# Altium PCB Board.PcbDoc
Units mil, origin at the board's own origin, x right, y up, seen from the top; angles counter-clockwise.
Board outline 3930 x 1750 mil, 2 copper layers (Top Layer, Bottom Layer); 33 components, 53 nets, 210 pads, 48 vias.
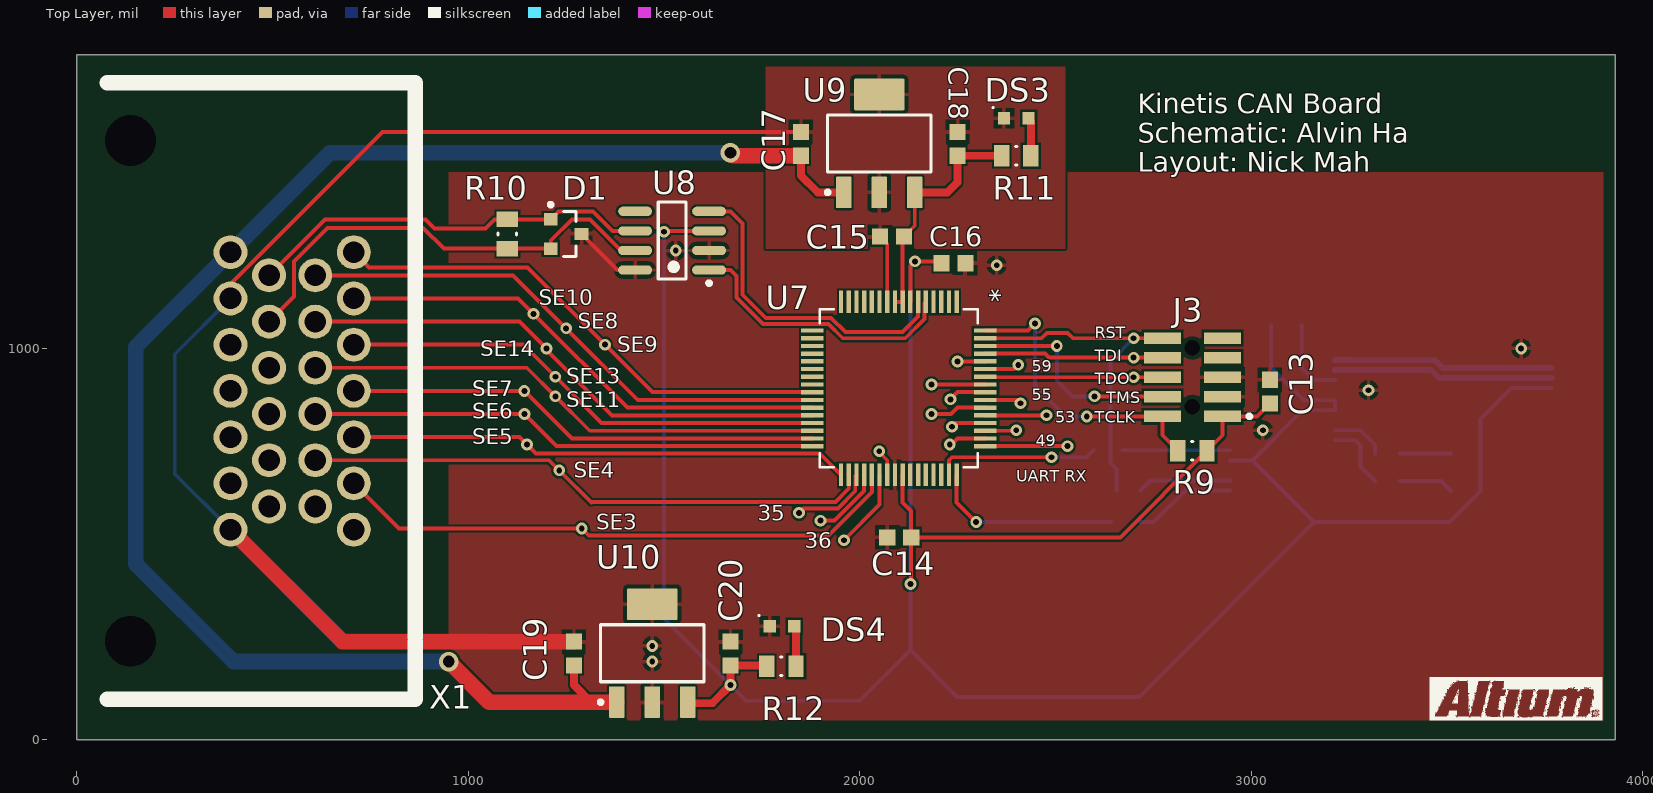
[diagram p0: Top Layer view]
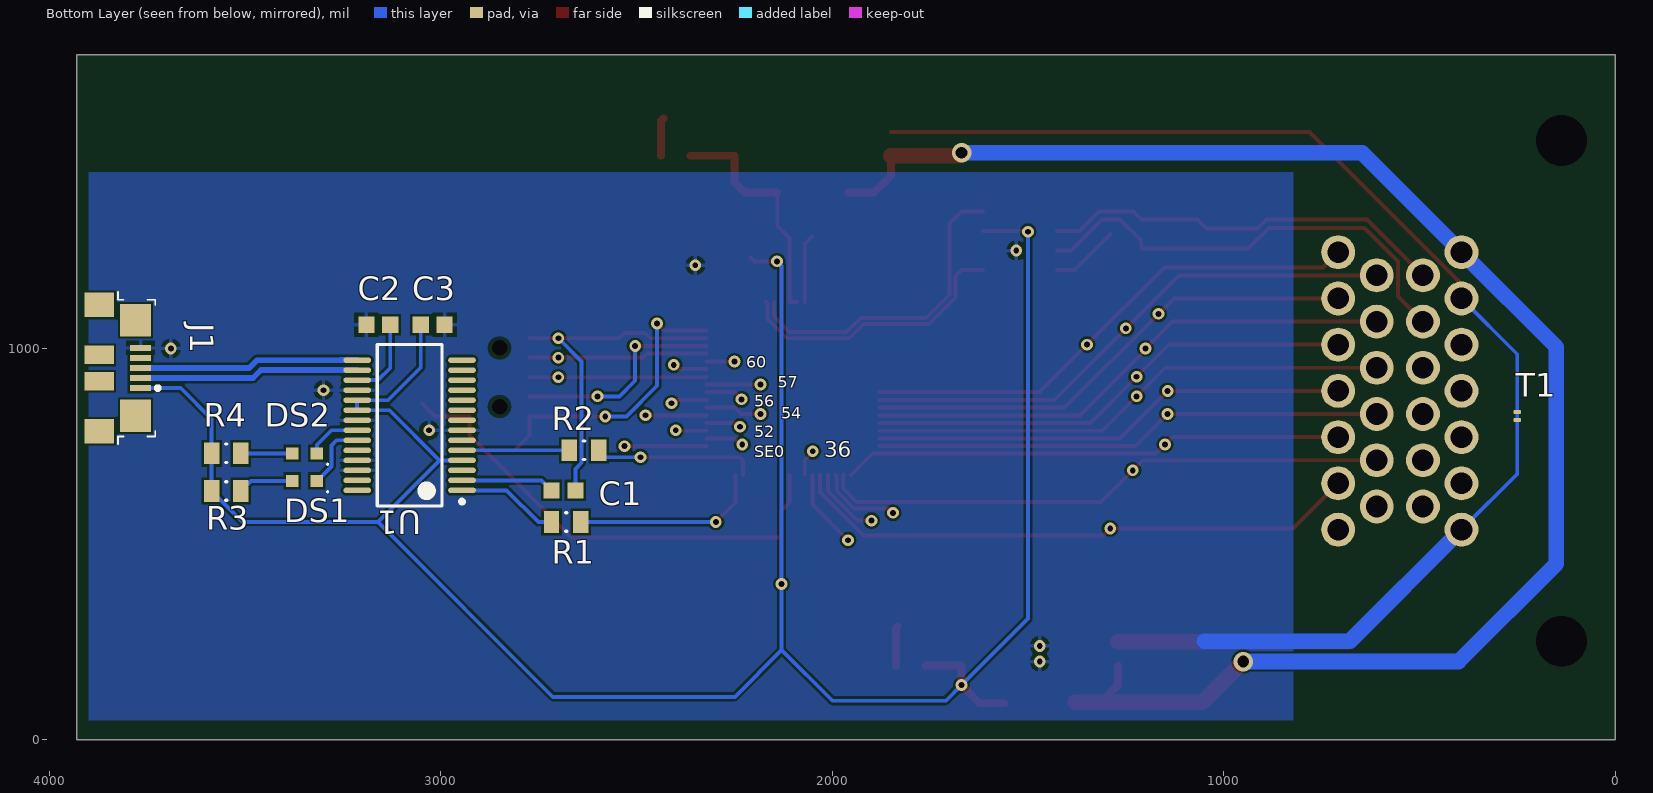
[diagram p1: Bottom Layer view, seen from below]

## Layer stack, top to bottom
Top Solder: solder mask 0.4, Solder Resist, Dk 3.5
Top Layer: signal copper 1.4
Dielectric 1: dielectric 12.6, FR-4, Dk 4.8
Bottom Layer: signal copper 1.4
Bottom Solder: solder mask 0.4, Solder Resist, Dk 3.5

## Board outline
0,0 3930,0 3930,1750 0,1750

## Design rules (kind name [scope] priority, off if disabled: settings)
Clearance [InNetClass('All Nets')] p1: gap=6 ignorepadtopadclearanceinfootprint=FALSE except(10: Arc-Hole Track-Hole SMDPad-Hole THPad-Hole Via-Hole Fill-Hole Poly-Hole Region-Hole Text-Hole)
DiffPairsRouting [All] p1: maxlimit=10 minlimit=10 mostfreqgap=10 toplayer_minwidth=10 toplayer_maxwidth=15 toplayer_prefwidth=15 bottomlayer_minwidth=10 bottomlayer_maxwidth=15 bottomlayer_prefwidth=15 maxuncoupledlength=500
FabricationTestPointUsage TestPointUsage [All] p1: valid=0 allowmultiple=FALSE
FabricationTestpoint Testpoint [All] p1: side=3 testpointundercomponent=TRUE minsize=40 maxsize=100 preferedsize=60 minholesize=20 maxholesize=40 preferedholesize=32 testpointgrid=1 allowsidetop=TRUE allowsidebottom=TRUE usegrid=TRUE gridtolerance=0.01
HoleSize [All] p1: absolutevalues=TRUE maxlimit=247 minlimit=10 maxpercent=80.000 minpercent=20.000
PasteMaskExpansion PasteMaskExpansion_1 [InComponent('P1')] p1: expansion=-150
PasteMaskExpansion [All] p2: expansion=0
PlaneClearance [All] p1: clearance=5
PlaneConnect [All] p1: planeconnectstyle=Relief reliefexpansion=15 reliefentries=4 reliefconductorwidth=10 reliefairgap=10
PolygonConnect [All] p1: connectstyle=Relief reliefconductorwidth=10 reliefentries=4 polygonreliefangle="90 Angle" airgapwidth=10
RoutingVias [All] p1: holewidth=15 width=30 viastyle="Through Hole" minholewidth=10 minwidth=20 maxholewidth=60 maxwidth=50
SilkToSolderMaskClearance SilkscreenOverComponentPads [IsPad] p1: minsilkscreentomaskgap=10 clearancetoexposedcopper=TRUE
SolderMaskExpansion [All] p1: expansion=5
UnRoutedNet [All] p1: checkbadconnections=TRUE
Width [All] p1: maxlimit=150 minlimit=6 preferedwidth=10 minimp=50.000000 maximp=50.000000 favimp=50.000000
21 further rules are at their usual default settings.

## Classes and differential pairs
net class ADC0_SE[15..0]: ADC0_SE0 ADC0_SE1 ADC0_SE2 ADC0_SE3 ADC0_SE4 ADC0_SE5 ADC0_SE6 ADC0_SE7 ADC0_SE8 ADC0_SE9 ADC0_SE10 ADC0_SE11 ADC0_SE12 ADC0_SE13 ADC0_SE14 ADC0_SE15
component class USB: C1 C2 C3 C? DS1 DS2 DS? J1 R1 R2 R3 R4 R? U1
component class KinetisCANBoard: T1 X1
component class PWR: C17 C18 C19 C20 DS3 DS4 R11 R12 U9 U10
component class MCU: C13 C14 C15 C16 J3 R9 U7
component class COM: D1 R10 U8
differential pair D: +D_P -D_N
differential pair CAN0: +CAN0_P -CAN0_N

## Components (designator, comment, footprint, x,y, rotation, side; value= is the part's Value field where it differs from the comment)
C1 "0.1uF" "CAP SMT 0603" 2595.35,575.44 r180 bottom
C2 "0.1uF" "CAP SMT 0603" 3068.32,998.51 r180 bottom
C3 "0.1uF" "CAP SMT 0603" 3112.6,1122.52 r0 bottom
C13 "0.1uF" "CAP SMT 0603" 2985.99,797.95 r270 top
C14 "0.1uF" "CAP SMT 0603" 2192.52,455.33 r0 top
C15 "0.1uF" "CAP SMT 0603" 2173.81,1223.71 r0 top
C16 "100 pF" "CAP SMT 0603" 2147.95,1279.5 r180 top
C17 "0.22uF" "CAP SMT 0603" 1787.99,1431.28 r270 top
C18 "0.1uF" "CAP SMT 0603" 2187.99,1431.28 r270 top
C19 "0.22uF" "CAP SMT 0603" 1207.99,128.98 r270 top
C20 "0.1uF" "CAP SMT 0603" 1607.99,128.98 r270 top
D1 "NUP2105LT1G" ONSC-SOT-23-3-318-08_V 1250,1292.54 r0 top
DS1 "APG1608CGKC/T" "GREEN LED" 3348.5,661.47 r0 bottom
DS2 "APG1608SURKC/T" "RED LED" 3348.5,731.74 r0 bottom
DS3 "APG1608CGKC/T" "GREEN LED" 2400,1587.77 r0 top
DS4 "APG1608CGKC/T" "GREEN LED" 1801.5,290 r0 top
J1 "ZX62R-B-5P" HIRO-ZX62R-B-5P_V 3820,950 r270 bottom
J3 "HDR2x5" "HDR 2X5" 2850,926.41 r90 top
R1 "1k" "RES SMT 0805" 2680,556.57 r180 bottom
R2 "1k" "RES SMT 0805" 2634.25,740 r180 bottom
R3 "1k" "RES SMT 0805" 3548.5,635.87 r0 bottom
R4 "1k" "RES SMT 0805" 3548.5,731.74 r0 bottom
R9 "10k" "RES SMT 0805" 2850,738.82 r0 top
R10 "120" "RES SMT 0805" 1100,1292.54 r270 top
R11 "470" "RES SMT 0805" 2400,1492.3 r0 top
R12 "470" "RES SMT 0805" 1799.74,188.03 r0 top
T1 "Net Tie" "NET TIE 10MIL" 250,827.5 r270 bottom net-tie
U1 "FT232RL" SSOP-28_L 3080,803.79 r0 bottom
U7 "MKE16F512VLH16" MKE16F512VLH16 2100,898.07 r270 top
U8 "MCP2551-E/SN" SOIC-SN8_N 1520.72,1275.35 r180 top
U9 "LM340MP-5.0" DCY0004A_M 2050,1523.8 r90 top
U10 "LM340MP-5.0" DCY0004A_M 1470,221.3 r90 top
X1 "TE Superseal 26 POS" TE_SUPERSEAL_26 550,891.54 r0 top

## Footprints (in the part's own frame and the unit in brackets; to place one, negate y for a bottom-side part, rotate by r counter-clockwise, add the part's x,y. Pads: shape width x height; smd on the part's side, far side on the other; paste and mask are expansions set on the pad)
"CAP SMT 0603" [mm] "Chip Capacitor, 2-Leads, Body 1.63x0.83mm, IPC Medium Density"
  rect 1.05x1.05 smd: 1(-3.1,1.575) 2(-1.55,1.575)
  body extent -3.22,1.08 -1.42,2.07, height 0.94
DCY0004A_M [mm] "SOT223, 4-Leads, Body 6.7x3.7mm, Pitch 2.3mm, IPC Low Density"
  rrect10% 2.05x1 smd: 1(-3.175,2.3) 2(-3.175,0) 3(-3.175,-2.3)
  rrect5% 2.05x3.25 smd: 4(3.175,0)
  silkscreen extent -3.3,-3.35 1.85,3.47, body extent -3.5,-3.25 3.5,3.25, height 1.62
"GREEN LED" [mm] "Chip Diode, 2-Leads, Body 1.60x0.80mm, IPC Medium Density"
  rect 0.8x0.8 smd: 1(-0.8,0) 2(0.8,0)
  silkscreen extent -1.55,0.65 -1.45,0.75, body extent -0.81,-0.4 0.81,0.4, height 1.1
"HDR 2X5" [mm] "Header, 10-Leads, Body 3.43x6.35mm, Pitch 1.27mm"
  rect 0.76x2.4 smd: 1(-2.54,-1.95) 2(-2.54,1.95) 3(-1.27,-1.95) 4(-1.27,1.95) 5(0,-1.95) 6(0,1.95) 7(1.27,-1.95) 8(1.27,1.95) 9(2.54,-1.95) 10(2.54,1.95)
  round 0 hole 1 unplated: MH1(-1.905,0) MH2(1.905,0)
  silkscreen extent -2.66,-3.83 -2.42,-3.58, body extent -3.17,-1.72 3.17,1.72, height 4.55
HIRO-ZX62R-B-5P_V [mm] "USB Micro-B R/A Connector"
  rect 0.4x1.35 smd: 1(1.3,1.338) 2(0.65,1.338) 3(0,1.338) 4(-0.65,1.338) 5(-1.3,1.338)
  rect 2.1x2 smd: 6(-3.1,1.012) 11(3.1,1.012)
  rect 1.6x1.9 smd: 7(-4.1,-1.338) 10(4.1,-1.338)
  rect 1.2x1.9 smd: 8(-0.85,-1.338) 9(0.85,-1.338)
  silkscreen extent -4.95,-0.13 4.95,2.58, body extent -4.4,-3.95 4.4,1.78, height 2.71
MKE16F512VLH16 [mil]
  rect 58x11 smd: 1(-221,147.64) 2(-221,127.95) 3(-221,108.27) 4(-221,88.58) 5(-221,68.9) 6(-221,49.21) 7(-221,29.53) 8(-221,9.84) 9(-221,-9.84) 10(-221,-29.53) 11(-221,-49.21) 12(-221,-68.9) 13(-221,-88.58) 14(-221,-108.27) 15(-221,-127.95) 16(-221,-147.64) 33(221,-147.64) 34(221,-127.95) 35(221,-108.27) 36(221,-88.58) 37(221,-68.9) 38(221,-49.21) 39(221,-29.53) 40(221,-9.84) 41(221,9.84) 42(221,29.53) 43(221,49.21) 44(221,68.9) 45(221,88.58) 46(221,108.27) 47(221,127.95) 48(221,147.64)
  rect 11x58 smd: 17(-147.64,-221) 18(-127.95,-221) 19(-108.27,-221) 20(-88.58,-221) 21(-68.9,-221) 22(-49.21,-221) 23(-29.53,-221) 24(-9.84,-221) 25(9.84,-221) 26(29.53,-221) 27(49.21,-221) 28(68.9,-221) 29(88.58,-221) 30(108.27,-221) 31(127.95,-221) 32(147.64,-221) 49(147.64,221) 50(127.95,221) 51(108.27,221) 52(88.58,221) 53(68.9,221) 54(49.21,221) 55(29.53,221) 56(9.84,221) 57(-9.84,221) 58(-29.53,221) 59(-49.21,221) 60(-68.9,221) 61(-88.58,221) 62(-108.27,221) 63(-127.95,221) 64(-147.64,221)
  silkscreen extent -202,-202 202,202, body extent -236,-237 236,236, height 61
"NET TIE 10MIL" [mil]
  rrect50% 10x19 smd: 1(10,0) 2(-10,0)
  Top Layer lines w10: 10,0 -10,0
ONSC-SOT-23-3-318-08_V [mm] "SOT23, 3-Leads, Body 2.92x1.3mm, Pitch 0.95mm"
  rect 0.9x0.8 smd: 1(-1,0.95) 2(-1,-0.95) 3(1,0)
  silkscreen extent -1.12,-1.46 0.65,2.02, body extent -0.65,-1.46 0.65,1.46, height 1.11
"RED LED" [mm] "Chip Diode, 2-Leads, Body 1.60x0.80mm, IPC Medium Density"
  rect 0.8x0.8 smd: 1(-0.8,0) 2(0.8,0)
  silkscreen extent -1.55,0.65 -1.45,0.75, body extent -0.8,-0.4 0.8,0.4, height 0.6
"RES SMT 0805" [mm] "Chip Resistor, 2-Leads, Body 2.05x1.25mm, IPC Medium Density"
  rect 1x1.4 smd: 1(-0.95,0) 2(0.95,0)
  silkscreen extent -0.05,-0.6 0.05,0.6, body extent -1.1,-0.7 1.1,0.7, height 0.5
SOIC-SN8_N [mm] "SOIC, 8-Leads, Body 4.9x3.9mm, Pitch 1.27mm, IPC Medium Density"
  oval 2.2x0.6 smd: 1(-2.4,1.905) 2(-2.4,0.635) 3(-2.4,-0.635) 4(-2.4,-1.905) 5(2.4,-1.905) 6(2.4,-0.635) 7(2.4,0.635) 8(2.4,1.905)
  silkscreen extent -2.53,-2.5 0.9,2.88, body extent -2,-2.5 2,2.5, height 1.75
SSOP-28_L [mm] "SOP, 28-Leads, Body 10.2x5.3mm, Pitch 0.65mm, IPC High Density"
  oval 1.8x0.35 smd: 1(-3.4,4.225) 2(-3.4,3.575) 3(-3.4,2.925) 4(-3.4,2.275) 5(-3.4,1.625) 6(-3.4,0.975) 7(-3.4,0.325) 8(-3.4,-0.325) 9(-3.4,-0.975) 10(-3.4,-1.625) 11(-3.4,-2.275) 12(-3.4,-2.925) 13(-3.4,-3.575) 14(-3.4,-4.225) 15(3.4,-4.225) 16(3.4,-3.575) 17(3.4,-2.925) 18(3.4,-2.275) 19(3.4,-1.625) 20(3.4,-0.975) 21(3.4,-0.325) 22(3.4,0.325) 23(3.4,0.975) 24(3.4,1.625) 25(3.4,2.275) 26(3.4,2.925) 27(3.4,3.575) 28(3.4,4.225)
  silkscreen extent -3.52,-5.25 2.1,5.25, body extent -2.8,-5.25 2.8,5.25, height 2
TE_SUPERSEAL_26 [mm]
  round 2.2 hole 1.4: 1(4,9) 2(4,6) 3(4,3) 4(4,0) 5(4,-3) 6(4,-6) 7(4,-9) 8(1.5,7.5) 9(1.5,4.5) 10(1.5,1.5) 11(1.5,-1.5) 12(1.5,-4.5) 13(1.5,-7.5) 14(-1.5,7.5) 15(-1.5,4.5) 16(-1.5,1.5) 17(-1.5,-1.5) 18(-1.5,-4.5) 19(-1.5,-7.5) 20(-4,9) 21(-4,6) 22(-4,3) 23(-4,0) 24(-4,-3) 25(-4,-6) 26(-4,-9)
  round 0 hole 3.3 unplated: 27(-10.5,16.25) 28(-10.5,-16.25)
  silkscreen extent -12,-20 8,20, body extent -30.05,-19.77 6.45,19.72, height 28.15

## Part data
C1 C2 C3 C13 C14 C15 C18 C20: library part "Capacitor 0.1uF 25V 0603", Supplier Part Number 1=445-5667-6-ND, Supplier 1=Digi-Key
C16: library part "Capacitor 100 pF 25V 0603", Supplier Part Number 1=445-4675-6-ND, Supplier 1=Digi-Key
C17 C19: library part "Capacitor 0.22uF 25V 0603", Supplier Part Number 1=445-5191-6-ND, Supplier 1=Digi-Key
D1: library part CMP-1063-00164-1, "Dual Line CAN Bus Protector, 3-Pin SOT-23, Pb-Free, Tape and Reel", Manufacturer="On Semiconductor", C Max (pF)=30, ComponentLink1Description="Manufacturer URL", ComponentLink1URL=http://www.onsemi.com/, ComponentLink2Description=Datasheet, ComponentLink2URL=http://www.onsemi.cn/pub_link/Collateral/NUP2105L-D.PDF, ComponentLink3Description="Package Specification", ComponentLink3URL=http://www.onsemi.cn/pub_link/Collateral/318-08.PDF, DatasheetVersion="Rev. 5", Direction=Bidirectional, IR Max (uA)=0.1, Mounting Technology="Surface Mount", Number of Lines=2, PackageDescription="3-Pin Small Outline Transistor, Body 2.92 x 1.3 mm, Pitch 0.95 mm", PackageReference=SOT-23-3-318-08, PackageVersion="Rev. AP, 11/2009", Packing="Tape and Reel", PartNumber=NUP2105LT1G, PPK Max (W)=350, RoHS=Pb-Free, V(BR) Min (V)=26.2
DS1 DS3 DS4: library part "Green LED", Supplier Part Number 1=754-1357-6-ND, Supplier 1=Digi-Key
DS2: library part "RED LED", Supplier Part Number 1=754-1359-6-ND, Supplier 1=Digi-Key
J1: library part CMP-0031-00001-1, "Connector; USBMicro-B,Reverse type, SMT; 5 Position; Right Angle", Operating Temperature="-30 to 85 degC", ComponentLink1Description="Manufacturer URL", ComponentLink1URL=http://www.hirose.com/‎, ComponentLink2Description=Datasheet, ComponentLink2URL=http://www.hirose.co.jp/cataloge_hp/e24200011.pdf, DatasheetVersion=08/2010, Mounting Technology="Surface Mount", PackageDescription="5-Pin USB Micro-B R/A Connector", PackageReference=ZX62R-B-5P, PartNumber=ZX62R-B-5P
J3: Supplier Part Number 1=1175-1735-ND, Supplier 1=Digi-Key
R1 R2 R3 R4: library part "Resistor 1k 1% 0805", Supplier Part Number 1=541-1.00KCDKR-ND, Supplier 1=Digi-Key
R9: library part "Resistor 10k 1% 0805", Supplier Part Number 1=541-10.0KCDKR-ND, Supplier 1=Digi-Key
R10: library part "Resistor 120 1% 0805", Supplier Part Number 1=541-120CDKR-ND, Supplier 1=Digi-Key
R11 R12: library part "Resistor 470 1% 0805", Supplier Part Number 1=541-470KCDKR-ND, Supplier 1=Digi-Key
U1: library part CMP-0078-00029-1, "USB UART Asynchronous Serial Data Transfer Chip, SSOP-28, Tape and Reel", DatasheetVersion="ver 2.07, Jul-2010", PackageDescription="28-Pin Small Outline Package 0.65 mm Pitch", PackageReference=SSOP-28, PackageVersion=2010
U8: library part CMP-0186-00038-2, "High-Speed CAN Transceiver, 8-Pin SOIC, Extended Temperature", Code_IPC=SOIC127P600-8, Code_JEDEC=MS-012, ComponentLink1Description="Manufacturer URL", ComponentLink1URL=http://www.microchip.com/, ComponentLink2Description=Datasheet, ComponentLink2URL=http://ww1.microchip.com/downloads/en/DeviceDoc/21667F.pdf, ComponentLink3Description="Package Specification", ComponentLink3URL=http://www.microchip.com/stellent/groups/techpub_sg/documents/packagingspec/en012702.pdf, DatasheetVersion="revF, Jul-2010", PackageDescription="8-Lead Plastic Small Outline (SN) - Narrow, 3.90mm Body [SOIC]", PackageReference=SOIC-SN8, PackageVersion="revBB, Aug-2009", RevisionNote="URLs added. DatasheetVersion updated."
U9 U10: library part CMP-0062-01765-3, "Series 3-Terminal Positive Regulators, 4-pin SOT-223", Manufacturer="Texas Instruments", PackageTopMarking=XYTT*N00A, PowerWise=N, Code_IPC=SOT223-4, Code_JEDEC=TO-261-AA, ComponentLink1Description="Datasheet URL", ComponentLink1URL=http://www.ti.com/general/docs/lit/getliterature.tsp?genericPartNumber=LM340-N&fileType=pdf, CompType="LDO IC", PackageDescription="Molded SOT-223, 6.50 x 3.56 x 1.6mm Body, 4 Lead, 2.3mm Pitch", PackageReference=DCY0004A, PinCount=4, RoHS=N

## Via types
v1: diameter 30, hole 15, Top Layer to Bottom Layer, 46 vias
v2: diameter 50, hole 30, Top Layer to Bottom Layer, 2 vias

## Nets (pads, with @x,y where several pads share a name; then routed paths per layer and width w, separated by ;. In a path a pad name is that pad's centre, name@x,y a point inside that pad or via, vN(x,y) a via of type N, cw(c..) or ccw(c..) an arc to the next point about the centre after c; other vN are vias at no path point)
12V: C17.2 C19.2 U9.1 U10.1 X1.20 | length 4127.9
  Top Layer w20: C19.2 1270,140 1313.7,96.3 ; C17.2 1850,1441.51 1892.72,1398.8 U9.1
  Top Layer w40: v2(950,200) 1053.7,96.3 1313.7,96.3 U10.1 ; v2(1669.65,1500) 1677.34,1492.3 C17.2
  Bottom Layer w40: v2(950,200) 400,200 150,450 150,1003.35 X1.20 646.65,1500 v2(1669.65,1500)
ADC0_SE0: U7.50 | length 97.4
  Top Layer w10: v1(2230,754.72) 2234.61,754.72 2250,770.11 U7.50
ADC0_SE1: U7.49 | length 209.9
  Top Layer w10: U7.49 v1(2530.91,750.43)
ADC0_SE2: U7.38 | length 204.7
  Top Layer w10: v1(1960,510) 2050.79,600.79 U7.38
ADC0_SE3: U7.37 X1.6 | length 1468.8
  Top Layer w10: X1.6 822.8,540 v1(1290,540) 1307.82,522.18 1920.45,522.18 2031.1,632.84 U7.37
ADC0_SE4: U7.34 X1.12 | length 1479.1
  Top Layer w10: X1.12@623.71,699.71 X1.12 1206.61,714.37 v1(1232.35,688.63) 1314.47,606.51 1315.47,607.51 1937.9,607.51 1972.05,641.66 U7.34 U7.34@1971.55,677.57
ADC0_SE5: U7.33 X1.5 | length 1284.8
  Top Layer w10: X1.5 1131.3,773.43 v1(1150,754.72) 1173.14,731.59 1897.84,731.59 U7.33
ADC0_SE6: U7.32 X1.11 | length 1303.9
  Top Layer w10: X1.11 v1(1143.71,832.48) 1225.76,750.43 U7.32
ADC0_SE7: U7.31 X1.4 | length 1221.8
  Top Layer w10: X1.4 v1(1143.15,891.54) 1264.57,770.11 U7.31
ADC0_SE8: U7.26 X1.8 | length 1401.8
  Top Layer w10: X1.8 1114.56,1186.81 v1(1250,1051.37) 1432.84,868.54 U7.26
ADC0_SE9: U7.25 X1.1 | length 1319.7
  Top Layer w10: X1.1 746.04,1207.3 1151.6,1207.3 v1(1349.26,1009.65) 1470.68,888.22 U7.25
ADC0_SE10: U7.21
ADC0_SE11: U7.30 X1.10 | length 1336.5
  Top Layer w10: X1.10 1149.41,950.59 v1(1222.41,877.59) 1310.2,789.8 U7.30
ADC0_SE12: U7.20
ADC0_SE13: U7.29 X1.3 | length 1254.4
  Top Layer w10: X1.3 1140.35,1009.65 v1(1222.41,927.59) 1340.52,809.48 U7.29
ADC0_SE14: U7.28 X1.9 | length 1371.5
  Top Layer w10: X1.9 1131.3,1068.7 v1(1200,1000) 1200,996.03 1366.87,829.17 U7.28
ADC0_SE15: U7.27 X1.2 | length 1287
  Top Layer w10: X1.2 1127.33,1127.76 v1(1166.7,1088.39) 1406.24,848.85 U7.27
AGND: C15.1 C17.1 C18.1 DS3.1 T1.2 U7.10 U9.2 U9.4 X1.21 | length 2179.4
  Top Layer w10: X1.21 392.52,1165.19 780.66,1553.32 C17.1 ; C15.1 2070.47,1267.01 U7.10
  Bottom Layer w10: T1.2 250,985.24 X1.21
AVCC_5V: C15.2 C18.2 R11.1 U7.8 U7.9 U9.3 | length 612.7
  Top Layer w10: U7.9 U7.8 2109.84,1282.77 C15.2 2140.55,1313.47 U9.3
  Top Layer w20: U9.3 2224.43,1398.8 2250,1424.37 C18.2 R11.1
AVCC_LED: DS3.2 R11.2 | length 97.9
  Top Layer w20: DS3.2 2437.4,1581.87 R11.2
CAN0_N: D1.1 R10.1 U8.6 X1.14 | length 1042.7
  Top Layer w10: X1.14 634.07,1329.94 890.88,1329.94 914.14,1306.68 1044.18,1306.68 1067.44,1329.94 R10.1 D1.1 1230.63,1349.94 1318.78,1349.94 1368.36,1300.35 U8.6
CAN0_P: D1.2 R10.2 U8.7 X1.15 | length 1185.3
  Top Layer w10: X1.15 554.75,1132.5 554.75,1222.33 640.66,1308.24 884.3,1308.24 937.4,1255.14 R10.2 D1.2 1210.63,1276 1264.57,1329.94 1310.5,1329.94 1390.08,1250.35 U8.7
CAN_UART_RX: U7.6 U8.4 | length 822.4
  Top Layer w10: U8.4 1670,1350.35 1701,1319.35 1701,1137.19 1759.98,1078.2 1927.08,1078.2 1963.26,1042.02 2109.73,1042.02 2149.21,1081.5 U7.6
CAN_UART_TX: U7.5 U8.1 | length 720.1
  Top Layer w10: U8.1 1669.65,1200.35 1685,1185 1685,1130.56 1753.36,1062.2 1920.45,1062.2 1956.63,1026.02 2116.36,1026.02 2165.71,1075.38 2165.71,1115.88 U7.5
D_N: J1.2 U1.16 | length 562.1
  Bottom Layer w15: U1.16 3256.79,944.54 3257.09,944.83 3459.64,944.83 3480.07,924.41 J1.2
D_P: J1.3 U1.15 | length 561.8
  Bottom Layer w15: U1.15 3256.79,970.13 3257.09,969.83 3470,969.83 3489.83,950 J1.3
DGND: C2.1 C3.1 C13.1 C14.1 C16.1 C19.1 C20.1 D1.3 DS4.1 J1.5 J3.3 J3.5 T1.1 U1.7 U1.18 U1.21 U1.25 U1.26 U7.40 U8.2 U8.8 U10.2 U10.4 X1.26 | length 2286.1
  Top Layer w10: D1.3 1381.55,1200.35 U8.8
  Top Layer w40: X1.26 678.7,251.02 C19.1
  Bottom Layer w10: T1.1 250,679.72 X1.26
  Bottom Layer w40: X1.26 677.95,251.77 1050,251.77
  other v1: 1470,200 1470,240 3030,790.99 3300,893.35 3690,1000 2350,1212.49 1530,1250
DTR: C1.1 U1.2 | length 239.3
  Bottom Layer w10: C1.1 2742.99,663.04 U1.2
DVCC_5V: C3.2 C13.2 C14.2 C16.2 C20.2 J1.1 J3.1 R3.2 R4.2 R9.2 R12.1 U1.4 U1.19 U1.20 U7.7 U7.41 U8.3 U10.3 | length 7702.7
  Top Layer w10: v1(1500,1298.24) 1502.12,1300.35 U8.3 ; U7.41 2109.84,606.51 2131.5,584.86 C14.2 ; v1(2129.53,398.03) 2131.5,400 C14.2 ; U7.7 2129.53,1211.02 v1(2141.1,1222.59) 2199.02,1222.59 C16.2@2208.98,1232.55 ; C13.2 3015.44,826.41 J3.1 2926.77,778.19 R9.2 2665.92,517.34 C14.2
  Top Layer w20: U10.3@1560.02,93.56 1623.56,93.56 v1(1670,140) C20.2 1760.37,190 R12.1
  Bottom Layer w10: v1(1500,1298.24) 1500,310 v1(1670,140) 1710,100 2000,100 2129.53,229.53 ; v1@2141.1,1227.96 v1(2141.1,1222.59) 2129.53,1211.02 v1(2129.53,398.03) 2129.53,229.53 ; U1.4 3003.23,714.22 ; C3.2 3051.57,951.46 3135.27,867.76 U1.19 U1.20 3131.18,842.17 3003.23,714.22 ; J1.1 3664.72,898.82 3585.91,820 R4.2 R3.2 3506.6,556.57 3160.88,556.57 ; 2129.53,229.53 2249.06,110 2714.3,110 3160.88,556.57 ; 3003.23,714.22 3160.88,556.57
DVCC_LED: DS4.2 R12.2 | length 103.7
  Top Layer w20: DS4.2 1837.14,285.85 R12.2
FTDI_GREEN: DS1.1 U1.23 | length 177.9
  Bottom Layer w10: U1.23 3267.14,765.4 3280,752.55 3280,698.47 DS1.1
FTDI_RED: DS2.1 U1.22 | length 140.7
  Bottom Layer w10: U1.22 3280,790.99 3317.01,753.98 DS2.1
FTDI_UART_RX: R2.2 U7.47 | length 427.8
  Top Layer w10: U7.47 2227.95,714.37 2235.7,722.11 2482.57,722.11 2490.32,729.86 v1(2490.32,722.11)
  Bottom Layer w10: v1(2490.32,722.11) 2578.96,722.11 R2.2
FTDI_UART_TX: R1.2 U7.48 | length 486.2
  Top Layer w10: U7.48 2247.64,606.51 v1(2297.58,556.57)
  Bottom Layer w10: v1(2297.58,556.57) R1.2
JTAG_RST: C1.2 J3.10 U7.63 | length 894.3
  Top Layer w10: U7.63 2464.69,1026.02 2478.67,1040 2531.33,1040 2545.31,1026.02 v1(2700,1026.02) 2770.47,1026.02 2772.05,1027.59 J3.10
  Bottom Layer w10: C1.2 2656.38,692.47 2640.97,707.88 2640.97,966.99 v1(2700,1026.02) v1@2700,1016.06
JTAG_TCLK: J3.4 U7.62 | length 560
  Top Layer w10: U7.62 v1(2503.74,1006.33) v1@2505.71,1006.33 ; v1(2600,877.59) 2772.05,877.59 J3.4
  Bottom Layer w10: v1(2503.74,1006.33) 2503.74,917.54 2543.68,877.59 v1(2600,877.59)
JTAG_TDI: J3.8 U7.61 | length 457.4
  Top Layer w10: U7.61 2473.35,986.65 2483.59,976.41 v1(2700,976.41) 2770.87,976.41 2772.05,977.59 J3.8
JTAG_TDO: J3.6 U7.58 | length 453.7
  Top Layer w10: U7.58 2322.18,926.41 v1(2700,926.41) 2770.87,926.41 2772.05,927.59 J3.6
JTAG_TMS: J3.2 R9.1 U7.64 | length 757.4
  Top Layer w10: U7.64 2429.74,1045.7 v1(2447.83,1063.8) ; v1(2580,826.41) 2767.72,826.41 2770.47,829.17 J3.2 2773.23,778.19 R9.1
  Bottom Layer w10: v1(2447.83,1063.8) 2447.83,904.76 2526.18,826.41 v1(2580,826.41)
NetDS1_2: DS1.2 R3.1 | length 141.7
  Bottom Layer w10: DS1.2 3485.51,661.47 R3.1
NetDS2_2: DS2.2 R4.1 | length 131.1
  Bottom Layer w10: DS2.2 R4.1
NetR1_1: R1.1 U1.1 | length 262.2
  Bottom Layer w10: R1.1 2751.16,556.57 2832.03,637.45 U1.1
NetR2_1: R2.1 U1.5 | length 274.6
  Bottom Layer w10: R2.1 2671.84,739.81 U1.5
NetU7_17: U7.17
NetU7_18: U7.18
NetU7_35: U7.35 | length 209.4
  Top Layer w10: v1(1845,580) 1856.51,591.51 1944.53,591.51 1988.55,635.54 1988.55,673.88 U7.35
NetU7_36: U7.36 | length 184.1
  Top Layer w10: v1(1900,560) 1935.64,560 2011.42,635.78 U7.36
NetU7_44: U7.44
NetU7_53: U7.53 | length 156.1
  Top Layer w10: U7.53 v1(2477.09,829.17)
NetU7_54: U7.54 | length 144.6
  Top Layer w10: v1(2183.15,832.48) 2233.63,832.48 2250,848.85 U7.54
NetU7_59: U7.59 | length 88.5
  Top Layer w10: U7.59 2394.25,947.28 v1(2405,958.03)
NetU7_60: U7.60 | length 71
  Top Layer w10: v1(2250,966.96) U7.60
VCC_3V3: C2.2 U1.17 | length 207.9
  Bottom Layer w10: C2.2 3129.35,950 3160.4,918.95 U1.17
pads on no net: J1.4 J1.6 J1.7 J1.8 J1.9 J1.10 J1.11 J3.7 J3.9 J3.MH1 J3.MH2 U1.3 U1.6 U1.8 U1.9 U1.10 U1.11 U1.12 U1.13 U1.14 U1.24 U1.27 U1.28 U7.1 U7.2 U7.3 U7.4 U7.11 U7.12 U7.13 U7.14 U7.15 U7.16 U7.19 U7.22 U7.23 U7.24 U7.39 U7.42 U7.43 U7.45 U7.46 U7.51 U7.52 U7.55 U7.56 U7.57 U8.5 X1.7 X1.13 X1.16 X1.17 X1.18 X1.19 X1.22 X1.23 X1.24 X1.25 X1.27 X1.28
copper on no net: | length 544.7
  Top Layer w10: v1@2050,734.93 2070.47,714.46 2070.47,677.07 ; v1(2183.15,907.91) 2321,907.91 ; v1(2231.78,870) 2250,888.22 2287,888.22 2321,888.22 ; v1(2235.7,800) 2245.18,809.48 2250,809.48 2287,809.48 2321,809.48 ; 2321,789.8 v1@2394.25,789.8 ; 2321,868.54 2355,868.54 v1@2401.46,868.54 ; v1@2410,860 v1(2410.75,860)
  other v1: 2050,737.31 2400,790.99

## Polygon pours and split planes (outlines as drawn)
DGND on Top Layer "Top Layer-No Net 1" (solid, pour order 4): 3900,50 3900,1450 950,1450 950,1437.4 950,50
AGND on Top Layer "NONET_L01_P002" (solid, pour order 2): 1760,1720 2525,1720 2525,1255 2450,1255 1760,1255
DGND on Bottom Layer "Bottom Layer-No Net" (solid, pour order 6): 822.8,1450 822.8,50 3900,50 3900,1450

## Other copper
Bottom Layer:
  pour cut-out: 300,1200
  pour cut-out: 300,1450

## Silkscreen, mask and mechanical layers (free items; w line width, h text height)
Top Overlay:
  drawing of 6 lines, arcs and shapes, not listed
  text "Kinetis CAN Board / Schematic: Alvin Ha / Layout: Nick Mah" at 2710,1450.96 h50
  text "SE10" at 1180,1110 h40
  text "SE8" at 1280,1050 h40
  text "RST" at 2600,1026.02 h30
  text "SE9" at 1380,990 h40
  text "SE14" at 1030,980 h40
  text "TDI" at 2600,966.96 h30
  text "59" at 2440,940 h30
  text "SE13" at 1250,910 h40
  text "TDO" at 2600,907.91 h30
  text "SE7" at 1010,877.59 h40
  text "55" at 2440,867.76 h30
  text "TMS" at 2630,860 h30
  text "SE11" at 1250,850 h40
  text "SE6" at 1010,820 h40
  text "53" at 2500,810 h30
  text "TCLK" at 2600,810 h30
  text "SE5" at 1010,754.72 h40
  text "49" at 2450,750 h30
  text "SE4" at 1270,670 h40
  text "UART RX" at 2400,660 h30
  text "35" at 1740,560 h40
  text "SE3" at 1327,537.2 h40
  text "36" at 1860,490 h40
Bottom Overlay:
  text "60" at 2220,950.59 h30
  text "57" at 2140,900 h30
  text "56" at 2200,851.41 h30
  text "54" at 2130,820 h30
  text "52" at 2200,773.43 h30
  text "36" at 2020,722.11 h40
  text "SE0" at 2200,722.11 h30
Mechanical 7:
  the board outline again, w1

## Text inside footprints (layer, text, board x,y; h text height)
J1: Mechanical 1 "Board edge" at 3925,730 h7.87 r90
U7: Top Overlay "*" at 2310,1118.07 h50 r270